# Altium PCB LM_001_Rev_F.PcbDoc (part 2 of 2)
Units mm, origin at the board's own origin, x right, y up, seen from the top; angles counter-clockwise.
Board outline 67 x 180 mm, 4 copper layers (Top Layer, +5V, Signal Layer 1, Bottom Layer), stack 0.778 mm thick; 116 components, 101 nets, 360 pads, 22 vias.
Unrouted connection lines stored in the file: 51.
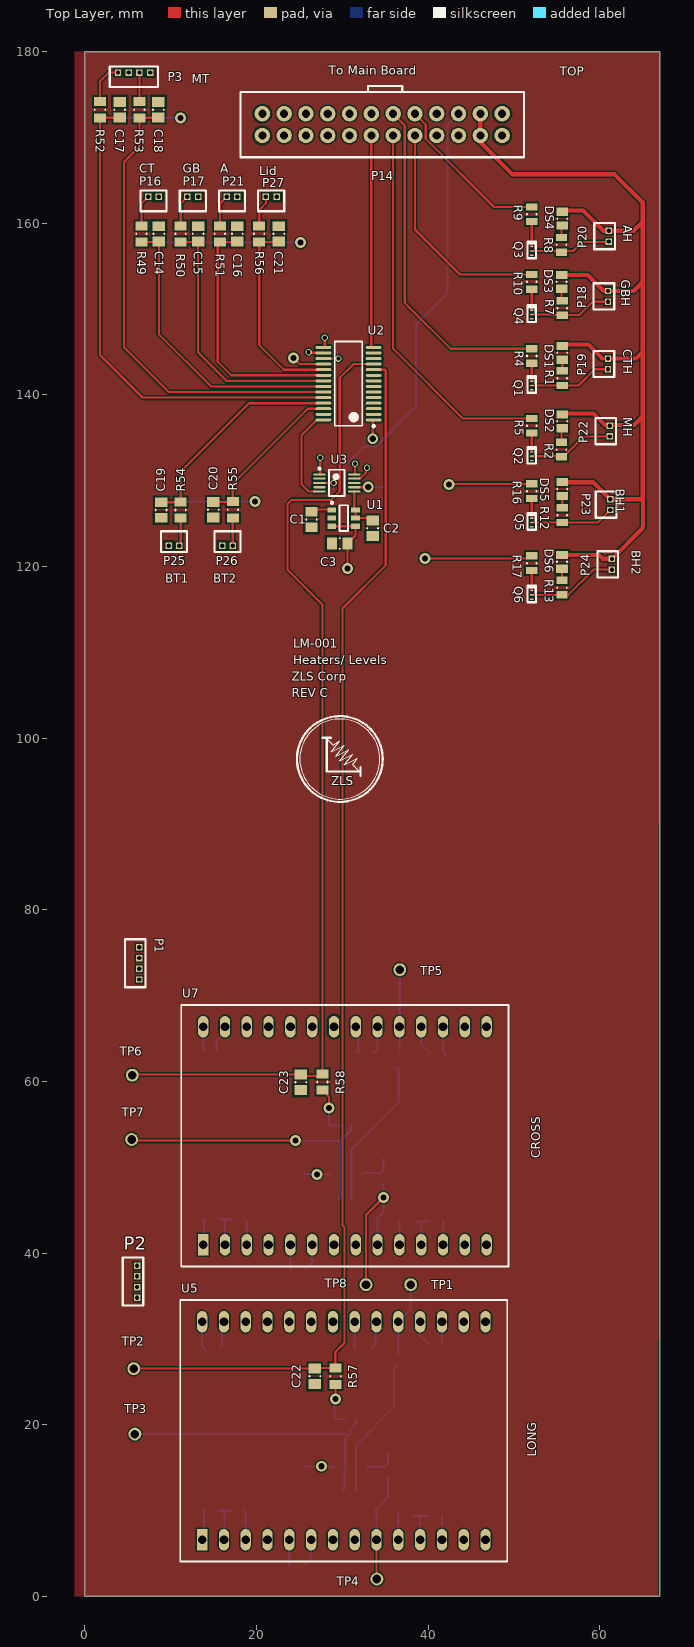
[diagram p0: Top Layer view]

## Via types
v1: diameter 1.27, hole 0.711, Top Layer to Bottom Layer, 15 vias
v2: diameter 0.75, hole 0.5, Top Layer to Bottom Layer, 7 vias

## Nets (pads, with @x,y where several pads share a name; then routed paths per layer and width w, separated by ;. In a path a pad name is that pad's centre, name@x,y a point inside that pad or via, vN(x,y) a via of type N, cw(c..) or ccw(c..) an arc to the next point about the centre after c; other vN are vias at no path point) (continued)
NetR59_1: R59.1 U5.17 | length 3.3
  Bottom Layer w0.254: U5.17@41.613,31.359 U5.17 41.613,29.535 R59.1
NetR59_2: R59.2 U5.18 | length 3.7
  Bottom Layer w0.254: U5.18@39.073,32.659 U5.18 39.073,30.375 R59.2
NetR60_1: R60.1 U7.17 | length 3.9
  Bottom Layer w0.254: U7.17@41.738,65.734 U7.17 41.738,63.506 R60.1
NetR60_2: R60.2 U7.18 | length 4.2
  Bottom Layer w0.254: U7.18@39.198,67.034 U7.18 39.198,64.346 R60.2
SPI0_MISO: P14.9 U3.1 | length 40.9
  Top Layer w0.254: U3.1 27.43,130.736 27.432,130.738 v2(27.432,132.671)
  Signal Layer 1 w0.254: v2(27.432,132.671) 30.848,136.086 30.848,169.994 P14.9@30.758,170.084
SPI0_SCLK: P14.10 U3.10 | length 42.9
  Top Layer w0.254: U3.10 31.481,130.736 31.483,130.738 v2(31.483,131.989)
  Signal Layer 1 w0.254: P14.10@30.758,172.624 30.98,172.624 32.118,171.486 32.118,132.624 v2(31.483,131.989)
Thermistor_CS0: P14.12 U3.9 | length 44.8
  Top Layer w0.254: U3.9 31.989,130.236 32.087,130.334 32.16,130.334 32.786,130.96 32.786,131.411 v2(32.88,131.506)
  Signal Layer 1 w0.254: v2(32.88,131.506) 34.658,133.284 34.658,171.486 33.52,172.624 P14.12@33.298,172.624
VR_REF_Cross: C13.1 R46.2 TP8.1 U7.9 | length 18.6
  Top Layer w0.254: TP8.1 32.766,44.45 v1(34.798,46.482)
  Bottom Layer w0.254: U7.9@34.077,41.128 34.118,41.169 34.118,43.732 34.262,43.876 34.237,43.901 C13.1 34.798,44.792 v1(34.798,46.482) 34.798,47.916 R46.2
VR_REF_Long: C10.1 R29.2 TP4.1 U5.9 | length 12.5
  Top Layer w0.254: U5.9 33.993,2.075 TP4.1
  Bottom Layer w0.254: U5.9 33.993,10.094 33.968,10.069 33.829,10.069 35.293,11.533 R29.2
pads on no net: P1.4 P2.4 P14.4 P14.5 Q4.3 Q6.3 U2.2 U2.3 U2.4 U2.5 U2.6 U2.7 U2.8 U2.9 U2.13 U5.4 U5.8 U5.13 U5.14 U5.15 U5.16 U5.23 U5.26 U7.4 U7.8 U7.13 U7.14 U7.15 U7.16 U7.23 U7.26

## Polygon pours and split planes (outlines as drawn)
GND on Signal Layer 1 "GND_L03_P003" (solid, pour order 3): -1.308,180 66.8,180 66.8,0 -1.308,0
GND on Top Layer "GND_L01_P001" (solid, pour order 1): -1.153,180 66.958,180 66.757,0 -1.153,0
GND on Bottom Layer "GND_L04_P000" (solid, pour order 0): -1.153,0 66.955,0 66.955,180 -1.153,180
+5 on +5V (split plane): 66.49,179.49 66.49,0.51 0.51,0.51 0.51,179.49

## Silkscreen, mask and mechanical layers (free items; w line width, h text height)
Top Overlay:
  circle w0.254: c29.722,97.567 r5
  circle w0.1: c29.722,97.567 r4.663
  lines w0.127: 28.198,99.929 28.96,99.167 29.722,99.675 28.706,98.405 30.23,99.167 29.214,97.897 30.738,98.659 29.722,97.389 31.246,98.151 30.23,96.881 31.754,97.643 31.246,96.881 32.008,96.119
  lines w0.254: 27.69,100.056 28.706,100.056 ; 28.198,99.929 28.198,96.119 32.008,96.119 ; 32.135,95.611 32.135,96.627 ; 33,175.311 33,176 37,176 37,175.336
  text "To Main Board" at 28.448,177.292 h1
  text "TOP" at 55.317,177.152 h1
  text "MT" at 12.446,176.276 h1
  text "CT" at 6.35,165.862 h1
  text "GB" at 11.43,165.862 h1
  text "A" at 15.768,165.862 h1
  text "Lid" at 20.32,165.608 h1
  text "AH" at 62.738,159.766 h1 r270
  text "GBH" at 62.484,153.416 h1 r270
  text "CTH" at 62.738,145.288 h1 r270
  text "MH" at 62.738,137.414 h1 r270
  text "BH1" at 61.849,129.083 h1 r270
  text "BH2" at 63.754,121.92 h1 r270
  text "BT1" at 9.398,118.11 h1
  text "BT2" at 14.986,118.11 h1
  text "LM-001" at 24.308,110.541 h1
  text "Heaters/ Levels" at 24.308,108.636 h1
  text "ZLS Corp" at 24.13,106.68 h1
  text "REV C" at 24.13,104.775 h1
  text "ZLS" at 28.706,94.519 h1
  text "CROSS" at 53.086,51.054 h1 r90
  text "LONG" at 52.578,16.256 h1 r90

## Dimensions
0,180 to 67,180 on Mechanical 13